# Altium PCB 分拣.PcbDoc
Units mil, origin at the board's own origin, x right, y up, seen from the top; angles counter-clockwise.
Board outline 3905 x 3915 mil, 2 copper layers (Top Layer, Bottom Layer); 36 components, 13 nets, 76 pads, 38 vias.
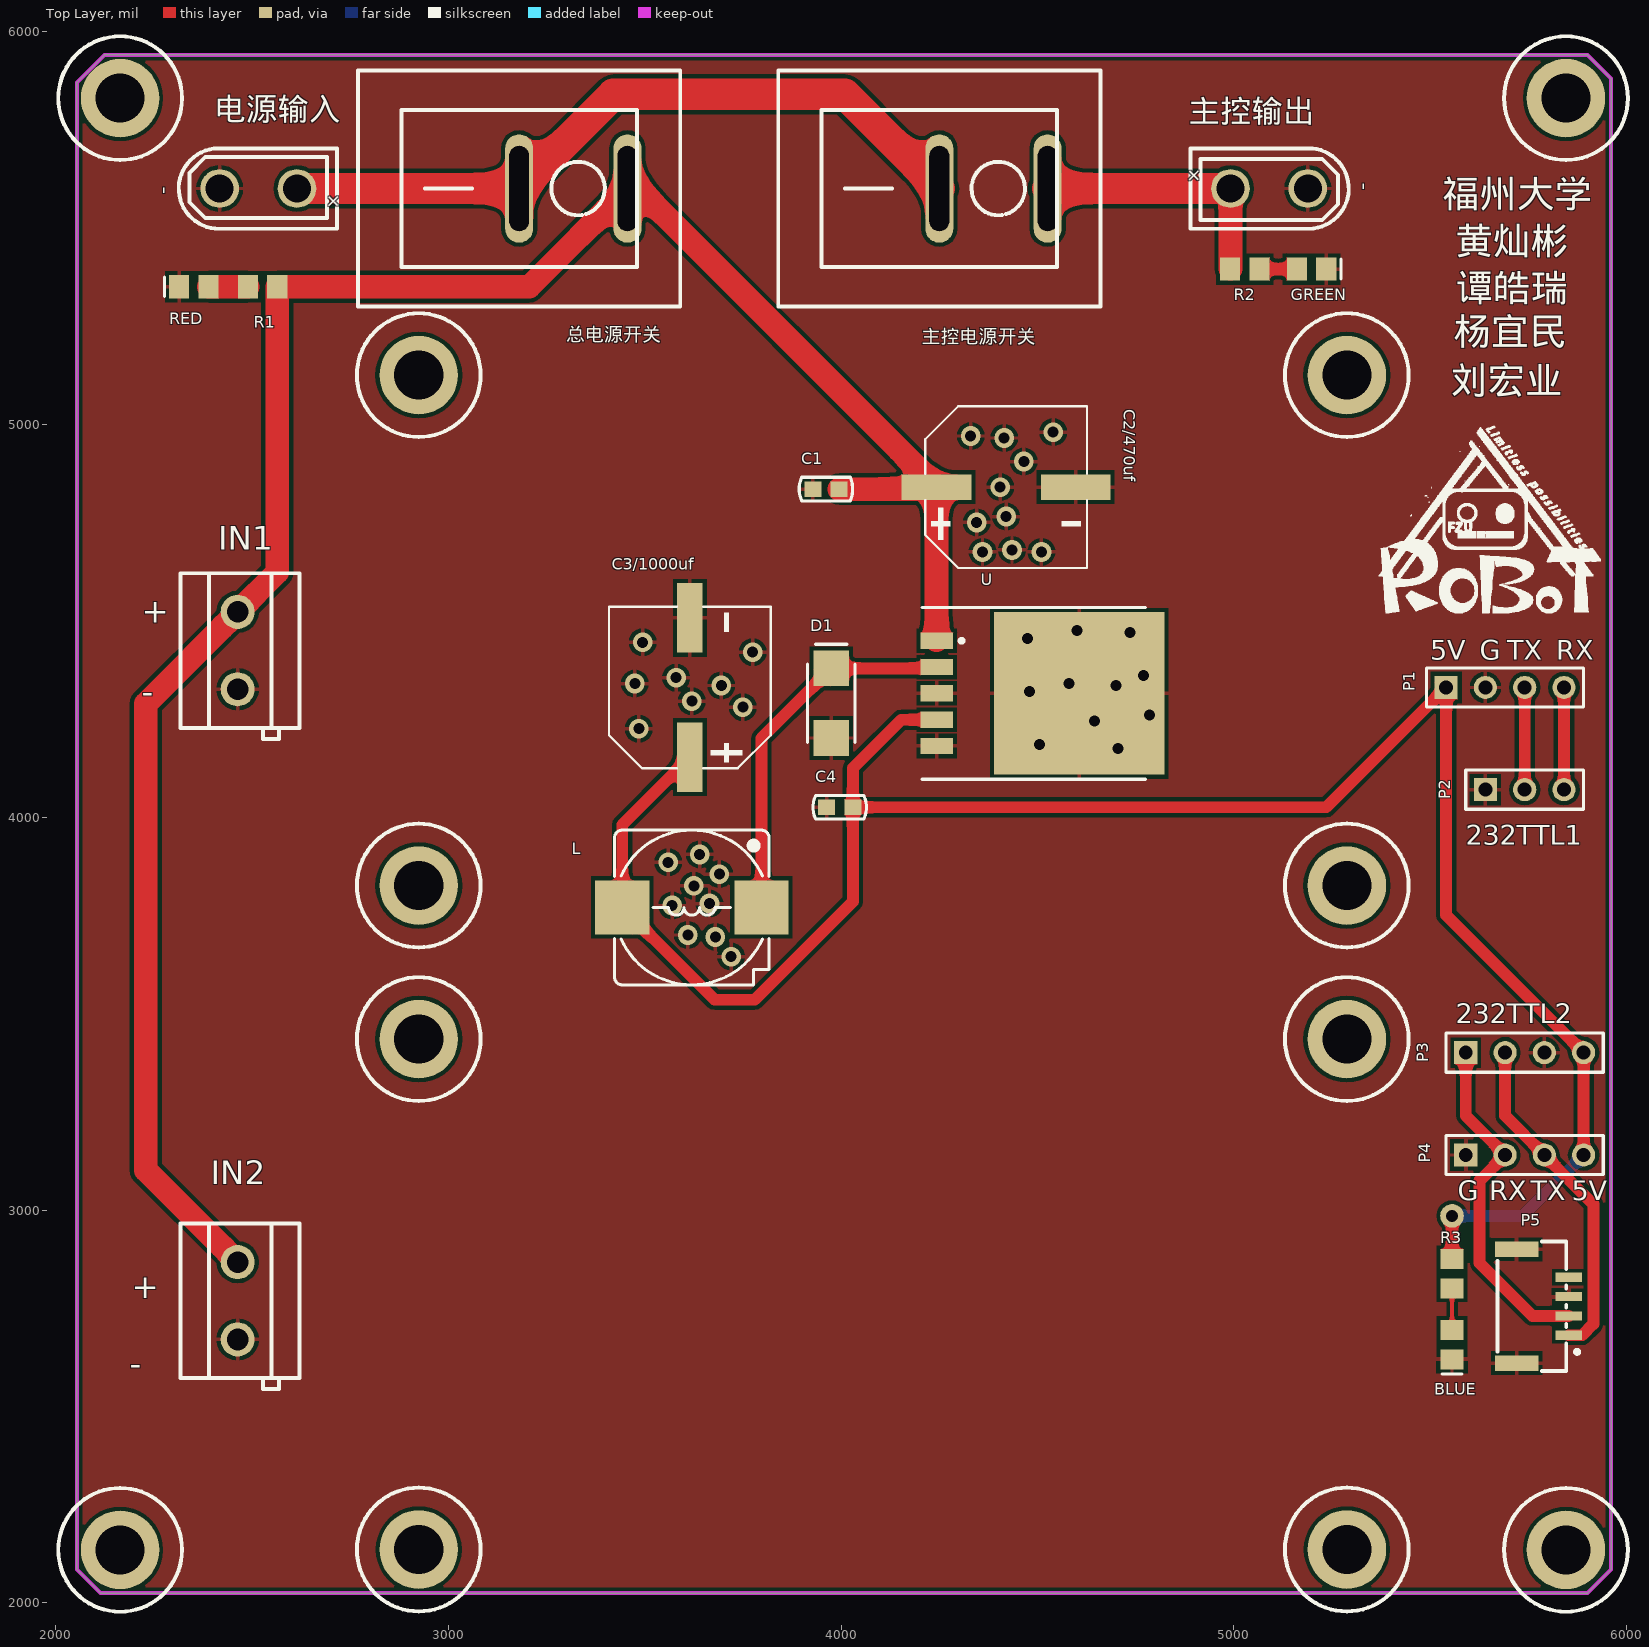
[diagram p0: Top Layer view]
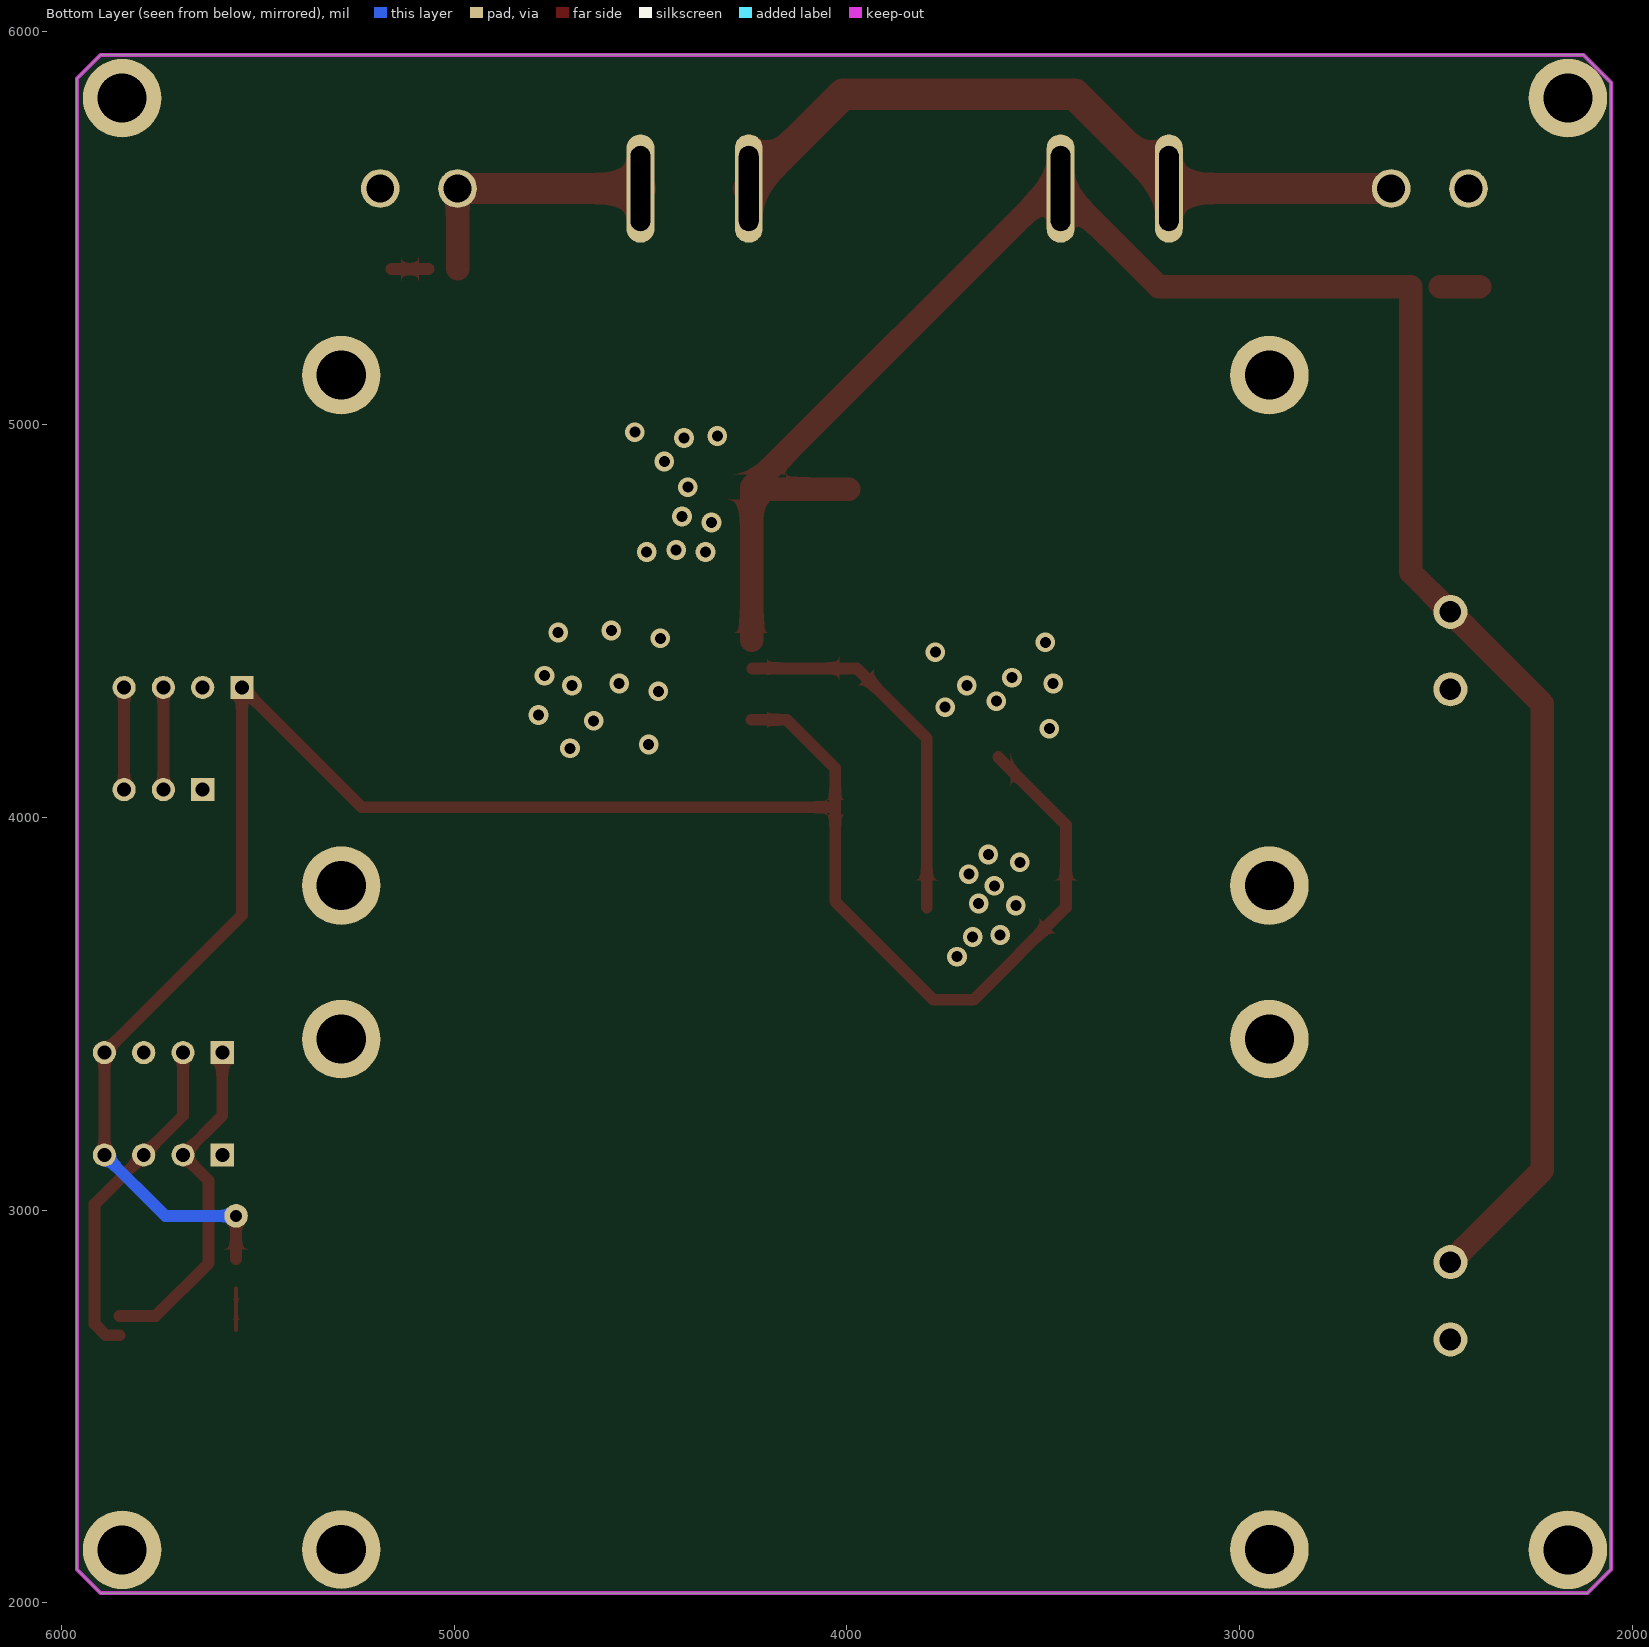
[diagram p1: Bottom Layer view, seen from below]

## Layer stack, top to bottom
Top Solder: solder mask 0.4, Solder Resist, Dk 3.5
Top Layer: signal copper 1.4
Dielectric 1: dielectric 12.6, FR-4, Dk 4.8
Bottom Layer: signal copper 1.4
Bottom Solder: solder mask 0.4, Solder Resist, Dk 3.5

## Board outline
2055,2085 2115,2025 5900,2025 5960,2085 5960,5880 5900,5940 2125,5940 2055,5870

## Design rules (kind name [scope] priority, off if disabled: settings)
Clearance [All] p1: gap=10 ignorepadtopadclearanceinfootprint=FALSE except(0: Arc-Hole Track-Hole SMDPad-Hole THPad-Hole Via-Hole Fill-Hole Poly-Hole Region-Hole Text-Hole)
PolygonConnect [All] p1: connectstyle=Relief reliefconductorwidth=10 reliefentries=4 polygonreliefangle="90 Angle" airgapwidth=10
RoutingVias [All] p1: holewidth=28 width=50 viastyle="Through Hole" minholewidth=28 minwidth=50 maxholewidth=28 maxwidth=50
SolderMaskExpansion [All] p1: expansion=4 istentingtop=FALSE
Width [All] p1: maxlimit=100 minlimit=10 preferedwidth=10
30 further rules are at their usual default settings.

## Classes and differential pairs
component class 分拣小车: BLUE C1 C2/470uf C3/1000uf C4 D1 GREEN IN1 IN2 L P1 P2 P3 P4 P5 R1 R2 R3 RED U 主控电源开关 主控输出 总电源开关 电源输入

## Components (designator, comment, footprint, x,y, rotation, side; value= is the part's Value field where it differs from the comment)
BLUE "LED0" LED_0805 5555,2657.4 r270 top
C1 "Cap" C-RAD-0603 3961.54,4835 r0 top
C2/470uf "" CAP-SMD_BD10.0-L10.3-W10.3-FD 4420,4840 r0 top (schematic designator C2/470uf/50V)
C3/1000uf "" CAP-SMD_BD10.0-L10.3-W10.3-FD 3615,4330 r90 top (schematic designator C3/1000uf/16V)
C4 "Cap" C-RAD-0603 3996.54,4025 r0 top
D1 "D-Schottky" DIODE-SMA 3975,4290 r90 top
GREEN "LED0" LED_0805 5197.6,5395 r0 top
IN1 "" CONN-TH_P5.00_KF301-5.0-2P 2470,4410 r270 top
IN2 "" CONN-TH_P5.00_KF301-5.0-2P 2470,2755 r270 top
L "47uH" L1010 3620,3760 r180 top
P1 "OPS" HDR1X4 5540,4330 r0 top
P2 "232TTL1" HDR1X3 5640,4070 r0 top
P3 "232TTL2" HDR1X4 5590,3400.7 r0 top
P4 "TTL2" HDR1X4 5590,3140 r0 top
P5 "" CONN-SMD_4P-P1.25_GH1.254P 5775,2755 r270 top
R1 "Res1" 0805-2 2527.6,5350 r180 top
R2 "Res1" 0805-2 5027.6,5395 r0 top
R3 "Res1" 0805-2 5555,2837.6 r270 top
RED "LED0" LED_0805 2352.6,5350 r180 top
U "LM2596S-5.0" TO-263-5 4410,4315 r270 top (schematic designator U1)
主控电源开关 "" SW-TH_R1966ABLKBLKFF 4249.41,5600 r0 top
主控输出 "XT30UPB-M" CONN-TH_XT30UPB-M 5110,5600 r180 top
总电源开关 "" SW-TH_R1966ABLKBLKFF 3180,5600 r0 top
电源输入 "XT30UPB-M" CONN-TH_XT30UPB-M 2496.19,5599.99 r0 top
? "Comment" M3x4+6_L 2165,2135 r270 top
? "Comment" M3x4+6_L 5845,2135 r270 top
? "Comment" M3x4+6_L 5845,5830 r270 top
? "Comment" M3x4+6_L 2165,5830 r270 top
? "Comment" M3x4+6_L 5287.2,2135.79 r270 top
? "Comment" M3x4+6_L 5287.2,3435 r270 top
? "Comment" M3x4+6_L 2925,2135.79 r270 top
? "Comment" M3x4+6_L 2925,3435 r270 top
? "Comment" M3x4+6_L 5287.2,3825.79 r270 top
? "Comment" M3x4+6_L 5287.2,5125 r270 top
? "Comment" M3x4+6_L 2925,3825.79 r270 top
? "Comment" M3x4+6_L 2925,5125 r270 top

## Footprints (in the part's own frame and the unit in brackets; to place one, negate y for a bottom-side part, rotate by r counter-clockwise, add the part's x,y. Pads: shape width x height; smd on the part's side, far side on the other; paste and mask are expansions set on the pad)
0805-2 [mm] "贴片无丝印"
  rect 1.3x1.5 smd: 1(-0.95,0) 2(0.95,0)
C-RAD-0603 [mm] "贴片电容"
  rect 1.1x1 smd: 1(-0.85,0) 2(0.85,0)
  silkscreen extent -1.73,-0.76 1.73,0.76, body extent -1.14,-0.38 1.14,0.38, height 1
CAP-SMD_BD10.0-L10.3-W10.3-FD [mm]
  rect 4.5x1.65 smd: 1(-4.5,0) 2(4.5,0)
  silkscreen extent -5.23,-5.23 5.23,5.23
CONN-SMD_4P-P1.25_GH1.254P [mm]
  rect 0.6x1.7 smd: 1(1.875,1.95) 2(0.625,1.95) 3(-0.625,1.95) 4(-1.875,1.95)
  rect 1x2.8 smd: 5(3.675,-1.4) 6(-3.675,-1.4)
  silkscreen extent -4.19,-2.65 4.19,2.62
CONN-TH_P5.00_KF301-5.0-2P [mm]
  round 2.2 hole 1.4: 1(-2.854,-0.15) 2(2.146,-0.15)
  silkscreen extent -5.35,-3.85 5.35,3.85
CONN-TH_XT30UPB-M [mm]
  round 2.5 hole 1.8: 1(-1.982,0) 2(3.018,0)
  silkscreen extent -4.63,-2.6 5.62,2.6
DIODE-SMA [mm] "贴片二极管"
  rect 2.3x2.3 smd: 1(-2.25,0) 2(2.25,0)
  silkscreen extent -2.54,-1.52 3.81,1.52, body extent -2.92,-1.4 2.92,1.4, height 3
HDR1X3 [mm] "Connector; Header; 3 Position"
  rect 1.5x1.5 hole 0.9: 1(0,0)
  round 1.5 hole 0.9: 2(2.54,0) 3(5.08,0)
  silkscreen extent -1.27,-1.27 6.35,1.27
HDR1X4 [mm] "Connector; Header; 4 Position"
  rect 1.5x1.5 hole 0.9: 1(0,0)
  round 1.5 hole 0.9: 2(2.54,0) 3(5.08,0) 4(7.62,0)
  silkscreen extent -1.27,-1.27 8.89,1.27
L1010 [mm]
  rect 3.5x3.5 smd: 1(-4.5,-0.254) 2(4.5,-0.254)
  silkscreen extent -5,-5.25 5,4.75
LED_0805 [mm] "贴片二极管"
  rect 1.3x1.5 smd: 1(-0.95,0) 2(0.95,0)
  silkscreen extent 1.91,-0.63 1.91,0.64
M3x4+6_L [mil] "M3铜柱，长：4mm，螺纹长：6mm"
  round 200 hole 125: 1(0,0)
  silkscreen extent -157,-157 157,157, body extent -106,-93 106,93, height 159
SW-TH_R1966ABLKBLKFF [mil]
  oval 71x276 hole 50 slot 216.53 at 90 deg: 1(0.59,0) 2(276.18,0)
  silkscreen extent -409,-300 411,300
TO-263-5 [mm] "贴片LM2596"
  rect 1.05x2.1 smd: 1(-3.4,-4.225) 2(-1.7,-4.225) 3(0,-4.225) 4(1.7,-4.225) 5(3.4,-4.225)
  rect 10.5x11 smd: 6(0,4.987)
  silkscreen extent -5.55,-5.18 5.55,9.28, body extent -5.33,-4.7 5.33,10.29, height 3

## Part data
BLUE GREEN RED: "发光二极管"
C1 C4: "无极性电容"
C2/470uf C3/1000uf: library part RVT1J101M1010
D1: "肖特基二极管"
IN1 IN2: library part KF301-5.0-2P
L: library part L
P1 P3 P4: library part "Header 4", "Header, 4-Pin"
P2: library part "Header 3", "Header, 3-Pin"
P5: library part GH1.254P立贴
R1 R2 R3: "贴片电阻"
U: "5V稳压芯片"
主控电源开关 总电源开关: library part KCD1-101船型开关黑色

## Free pads (board coordinates)
  round 60 hole 30: 2(5555,2985)

## Via types
v1: diameter 50, hole 28, Top Layer to Bottom Layer, 38 vias

## Nets (pads, with @x,y where several pads share a name; then routed paths per layer and width w, separated by ;. In a path a pad name is that pad's centre, name@x,y a point inside that pad or via, vN(x,y) a via of type N, cw(c..) or ccw(c..) an arc to the next point about the centre after c; other vN are vias at no path point)
5VOPS: C3/1000uf.1 C4.2 L.2 P1.1 P3.4 P4.4 pad.2 R3.1 U.4 | length 5327.4
  Top Layer w30: C3/1000uf.1 3442.83,3980.67 L.2 3677.83,3535 3780,3535 4030,3785 C4.2 ; U.4 4153.07,4248.07 4030,4125 C4.2 ; R3.1 pad.2 ; P4.4 P3.4 5540,3750.7 P1.1 5235,4025 C4.2
  Bottom Layer w30: pad.2 5735,2985 P4.4
232RX: P1.4 P2.3 | length 260
  Top Layer w30: P2.3 P1.4
232TX: P1.3 P2.2 | length 260
  Top Layer w30: P2.2 P1.3
GND: BLUE.2 C1.1 C2/470uf.2 C3/1000uf.2 C4.1 D1.1 GREEN.2 IN1.2 IN2.2 P1.2 P2.1 P3.3 P4.1 P5.3 P5.5 P5.6 RED.2 U.3 U.5 U.6 主控输出.1 电源输入.1
  other v1: 3720,3645 3680,3695 3610,3700 3570,3775 3665,3780 3625,3825 3690,3855 3560,3885 3640,3905 4705,4175 4505,4185 3485,4225 4645,4245 4785,4260 3750,4280 3620,4295 4480,4320 3695,4335 4700,4335 3475,4340 4580,4340 3580,4355 4770,4360 3775,4420 3495,4445 4475,4455 4735,4470 4600,4475 4360,4675 4510,4675 4435,4680 4345,4750 4420,4765 4405,4840 4465,4905 4415,4965 4330,4970 4540,4980
NetBLUE_1: BLUE.1 R3.2 | length 105.4
  Top Layer w10: BLUE.1 R3.2
NetD1_2: D1.2 L.1 U.2 | length 952.3
  Top Layer w10: U.2@4240.31,4378.58 U.2
  Top Layer w30: L.1 3797.17,4200.75 D1.2 U.2@4240.31,4378.58
NetGREEN_1: GREEN.1 R2.2 | length 95.2
  Top Layer w30: R2.2 GREEN.1
NetR1_2: R1.2 RED.1 | length 100.2
  Top Layer w60: RED.1 R1.2
TTLRX: P3.1 P4.2 P5.2 | length 886.6
  Top Layer w30: P3.1 5590,3240 P4.2 5625,3075 5625,2865 5759.6,2730.4 P5.2
TTLTX: P3.2 P4.3 P5.1 | length 859.1
  Top Layer w30: P3.2 5690,3240 P4.3 5915,3015 5915,2710 5886.2,2681.2 P5.1
VCC1: C1.2 C2/470uf.1 IN1.1 IN2.1 R1.1 U.1 总电源开关.2 | length 5455.9
  Top Layer w10: C2/470uf.1@4237.84,4835 C2/470uf.1 ; U.1@4242.84,4449.68 U.1
  Top Layer w60: IN2.1 2230,3101.46 2230,4288.27 IN1.1 2565,4623.27 R1.1 3206.18,5350 总电源开关.2 3482.84,5600 C2/470uf.1 U.1@4242.84,4449.68 ; C1.2 C2/470uf.1@4237.84,4835
VCC2: R2.1 主控电源开关.2 主控输出.2 | length 671
  Top Layer w10: R2.1 R2.1@4991.19,5396
  Top Layer w60: R2.1@4991.19,5396 主控输出.2
  Top Layer w80: 主控电源开关.2 主控输出.2
VIN: 主控电源开关.1 总电源开关.1 电源输入.2 | length 1833.8
  Top Layer w80: 电源输入.2 总电源开关.1 3420.59,5840 4010,5840 主控电源开关.1
pads on no net: ?.1 P5.4

## Polygon pours and split planes (outlines as drawn)
GND on Top Layer "Top Layer-No Net" (solid, pour order 2): 2055,2085 2115,2025 5900,2025 5960,2085 5960,5880 5900,5940 2125,5940 2055,5870

## Keep-outs
Keep-Out Layer:
  the board outline again, w10

## Silkscreen, mask and mechanical layers (free items; w line width, h text height)
Top Overlay:
  drawing of 3072 lines, arcs and shapes, not listed
  text "福州大学" at 5530,5530 h120
  text "黄灿彬" at 5565,5410 h120
  text "谭皓瑞" at 5565,5290 h120
  text "杨宜民" at 5560,5180 h120
  text "刘宏业" at 5550,5055 h120
  text "+" at 2220,4495 h60
  text "5V" at 5500,4400 h50
  text "G" at 5625,4400 h50
  text "TX" at 5695,4400 h50
  text "RX" at 5820,4400 h50
  text "-" at 2220,4290 h60
  text "232TTL1" at 5590,3930 h50
  text "232TTL2" at 5565,3475 h50
  text "G" at 5570,3025 h50
  text "RX" at 5650,3025 h50
  text "TX" at 5755,3025 h50
  text "5V" at 5860,3025 h50
  text "+" at 2195,2775 h60
  text "-" at 2190,2580 h60

## Text inside footprints (layer, text, board x,y; h text height)
主控输出: Top Overlay "-" at 5314.93,5614.99 h39.37 r270; Top Overlay "+" at 4893.54,5606.07 h39.37 r45
电源输入: Top Overlay "-" at 2291.26,5585 h39.37 r90; Top Overlay "+" at 2712.66,5593.92 h39.37 r225